# EAGLE board Eagle (EAGLE 9.5.2)
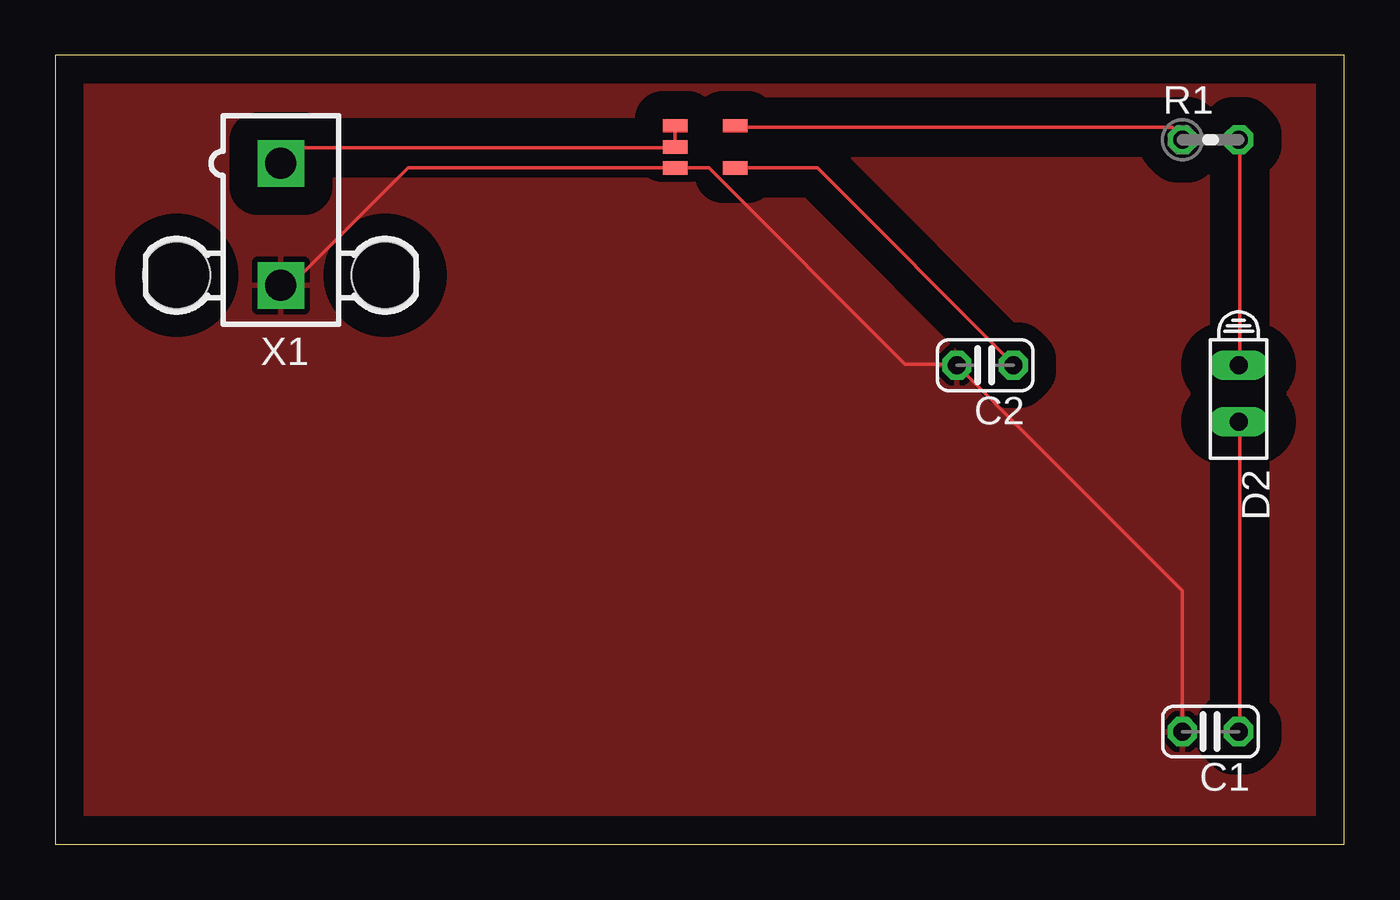
[diagram p0: board, top side]

Size 58.09 x 35.55 mm. Coordinates in mm from the lower left corner, seen from the top.
Outline: 0,0 58.09,0 58.09,35.55 0,35.55 0,0
Copper layers (1*16): Top 0.035mm / dielectric 1.5mm / Bottom 0.035mm
Design rules "default": minimum track width 6mil, minimum drill 0.35mm, track to track 6mil, track to pad 6mil, pad to pad 6mil, via to via 6mil, smd to smd 6mil, copper to edge 40mil, drill to drill 6mil, minimum pad ring 10mil, minimum via ring 8mil, stop-mask expansion 4mil, vias tented up to drill 0mil, thermal gap 10mil

## Footprints (pad centres in the part's own frame; a part is rotated, then mirrored left to right if it is on the bottom)
C025-024X044 = drill 0.813 octagon: 1 -1.27,0; 2 1.27,0
HLMP6 = drill 0.813 long: A -1.27,0; K 1.27,0
0204V = drill 0.813 octagon: 1 -1.27,0; 2 1.27,0
TPS799 = smd 1.1 x 0.6: EN 0,0.95; GND 0,0; IN 0,1.9; NR 2.7,0; OUT 2.7,1.9
5566-2 = drill 1.4 square: 1 0,-2.75; 2 0,2.75 | hole 3: 4.7,2.29; -4.7,2.29

## Placement (x,y rotation side)
C1  [C025-024X044]  52.07,5.08 180 top
C2  [C025-024X044]  41.91,21.59 180 top
D2  HLMP6  [HLMP6]  53.34,20.32 270 top
R1  [0204V]  52.07,31.75 0 top
U$1  TPS799  [TPS799]  27.94,30.48 0 top
X1  5566-2  [5566-2]  10.16,27.94 180 top

## Library data of the parts
C1 C2 = rcl; SPICEPREFIX: C
D2 = display-hp; MF: AGILENT TECHNOLOGIES; MPN: HLMP-6500; OC_FARNELL: 1652490; OC_NEWARK: 40K0088
R1 = rcl; SPICEPREFIX: R
U$1 = TPS799
X1 = con-molex; MF: MOLEX; OC_FARNELL: 1822072; OC_NEWARK: unknown

## Nets
GND: C1.2 C2.2 U$1.GND X1.2
N$1: C1.1 D2.K
N$2: U$1.EN U$1.IN X1.1
N$3: C2.1 U$1.NR
N$4: R1.1 U$1.OUT
N$5: D2.A R1.2

## Tracks (layer width: path | path; a pad name or v marks a point on that pad's centre or on a via)
GND
  Top 0.152: C1.2 50.8,11.43 C2.2 40.59,21.64 38.3,21.64 29.46,30.48 U$1.GND 15.9,30.48 10.72,25.3 10.26,25.3 X1.2
  pour Top (isolate 1.27): -7.62,58.42 -7.62,-16.51 87.63,-16.51 87.63,58.42
N$1
  Top 0.152: C1.1 53.39,5.18 53.39,19.05 D2.K
N$2
  Top 0.152: U$1.IN U$1.EN 27.94,31.39 10.87,31.39 10.26,30.79 X1.1
N$3
  Top 0.152: U$1.NR 34.34,30.48 43.18,21.64 C2.1
N$4
  Top 0.152: U$1.OUT 30.68,32.31 50.34,32.31 50.8,31.85 R1.1
N$5
  Top 0.152: D2.A 53.39,21.64 53.39,31.7 R1.2